# EAGLE board power_rev1 (EAGLE 9.6.1)
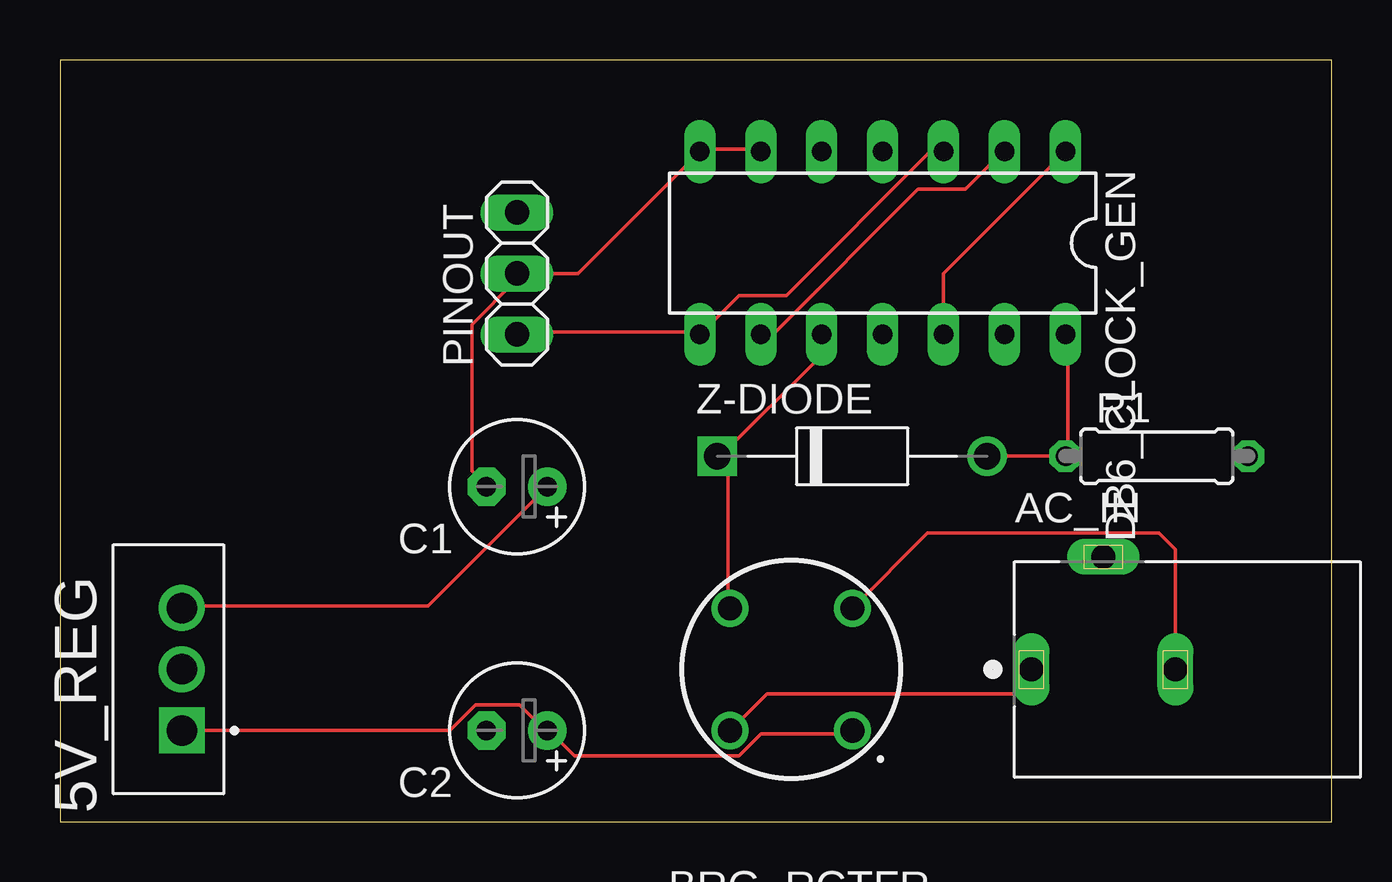
[diagram p0: board, top side]
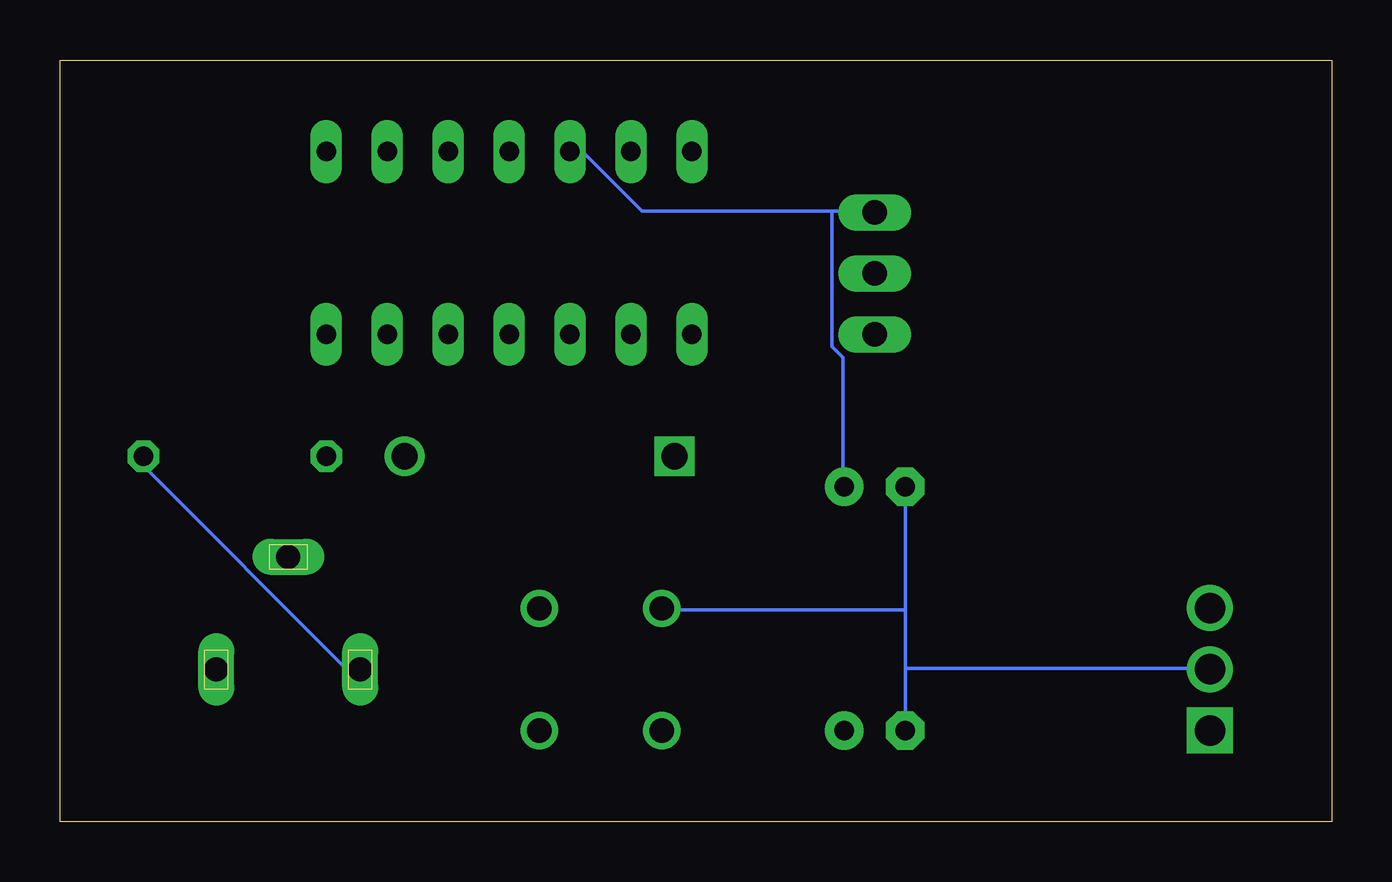
[diagram p1: board, bottom side, seen from below]

Size 53.01 x 31.76 mm. Coordinates in mm from the lower left corner, seen from the top.
Outline: 0,0 53.01,0 53.01,31.76 0,31.76 0,0
Copper layers (1*16): Top 0.035mm / dielectric 1.5mm / Bottom 0.035mm
Design rules "default": minimum track width 6mil, minimum drill 0.35mm, track to track 6mil, track to pad 6mil, pad to pad 6mil, via to via 6mil, smd to smd 6mil, copper to edge 40mil, drill to drill 6mil, minimum pad ring 10mil, minimum via ring 8mil, stop-mask expansion 4mil, vias tented up to drill 0mil, thermal gap 10mil

## Footprints (pad centres in the part's own frame; a part is rotated, then mirrored left to right if it is on the bottom)
TO255P1040X460X1968-3 = drill 1.27 pad 1.91 square: 1 0,0 | drill 1.27 pad 1.91: 2 2.55,0; 3 5.1,0
CUI_PJ-102A = drill 1 long: 1 -6.5,0; 2 -0.5,0; 3 -3.5,4.7
2W10 = drill 1.01 pad 1.55: 1 -2.55,2.55; 2 -2.55,-2.55; 3 2.55,-2.55; 4 2.55,2.55
E2,5-6 = drill 0.813 pad 1.6: + -1.27,0 | drill 0.813 pad 1.6 octagon: - 1.27,0
DIL14 = drill 0.813 long: 1 -7.62,-3.81; 2 -5.08,-3.81; 3 -2.54,-3.81; 4 0,-3.81; 5 2.54,-3.81; 6 5.08,-3.81; 7 7.62,-3.81; 8 7.62,3.81; 9 5.08,3.81; 10 2.54,3.81; 11 0,3.81; 12 -2.54,3.81; 13 -5.08,3.81; 14 -7.62,3.81
1X03 = drill 1.016 long: 1 -2.54,0; 2 0,0; 3 2.54,0
0207/7 = drill 0.813 octagon: 1 -3.81,0; 2 3.81,0
DIOAD1125W80L520D270 = drill 1.1: A 5.625,0 | drill 1.1 square: C -5.625,0

## Placement (x,y rotation side)
5V_REG  L7805CV  [TO255P1040X460X1968-3]  5.08,3.81 90 top
AC_IN  PJ-102A  [CUI_PJ-102A]  46.99,6.35 0 top
BRG_RCTFR  2W10  [2W10]  30.48,6.35 180 top
C1  100μF  [E2,5-6]  19.05,13.97 180 top
C2  100μF  [E2,5-6]  19.05,3.81 180 top
DB6_CLOCK_GEN  74LS90N  [DIL14]  34.29,24.13 180 top
PINOUT  [1X03]  19.05,22.86 90 top
R1  1000Ω  [0207/7]  45.72,15.24 0 top
Z-DIODE  1N4733A  [DIOAD1125W80L520D270]  33.02,15.24 0 top

## Library data of the parts
5V_REG = L7805CV; AVAILABILITY: Unavailable; DESCRIPTION: Linear Voltage Regulator IC 1 Output 1.5A TO-220; MF: STMicroelectronics; MP: L7805CV; PACKAGE: TO-220 STMicroelectronics; PRICE: None
AC_IN = PJ-102A; MANUFACTURER: CUI INC; PART_REV: 1.03; STANDARD: Manufacturer recommendations
BRG_RCTFR = 2W10; ARROW_PART_NUMBER: 2W10; ARROW_PRICE-STOCK: https://www.arrow.com/en/products/2w10/good-ark-semiconductor; DESCRIPTION: Silicon Bridge Rectifier, single phase, 2.0A; HEIGHT: mm; MANUFACTURER_NAME: Good-Ark; MANUFACTURER_PART_NUMBER: 2W10
C1 C2 = rcl; SPICEPREFIX: C
DB6_CLOCK_GEN = 74xx-us
PINOUT = pinhead
R1 = rcl; SPICEPREFIX: R
Z-DIODE = 1n4733a

## Nets
10_HZ_OUT: DB6_CLOCK_GEN.3 DB6_CLOCK_GEN.8 PINOUT.1
60_HZ: DB6_CLOCK_GEN.14 R1.1 Z-DIODE.A
GND: 5V_REG.2 BRG_RCTFR.3 C1.- C2.- DB6_CLOCK_GEN.6 DB6_CLOCK_GEN.7 DB6_CLOCK_GEN.10 PINOUT.2 Z-DIODE.C
N$2: AC_IN.2 BRG_RCTFR.2
N$3: AC_IN.1 BRG_RCTFR.4 R1.2
N$4: DB6_CLOCK_GEN.1 DB6_CLOCK_GEN.12
N$5: 5V_REG.1 BRG_RCTFR.1 C2.+
N$8: DB6_CLOCK_GEN.2 DB6_CLOCK_GEN.9
VCC: 5V_REG.3 C1.+ DB6_CLOCK_GEN.5 PINOUT.3

## Tracks (layer width: path | path; a pad name or v marks a point on that pad's centre or on a via)
10_HZ_OUT
  Top 0.152: PINOUT.1 19.15,20.42 26.62,20.42 DB6_CLOCK_GEN.8 28.3,21.95 30.28,21.95 36.22,27.89 36.83,27.89 DB6_CLOCK_GEN.3
60_HZ
  Top 0.152: Z-DIODE.A R1.1 42.01,15.24 42.01,20.27 DB6_CLOCK_GEN.14
GND
  Top 0.152: 27.53,15.24 31.65,19.36 31.65,20.27 DB6_CLOCK_GEN.10 | 27.53,15.24 27.84,14.94 27.84,8.99 BRG_RCTFR.3 | 27.53,15.24 Z-DIODE.C | DB6_CLOCK_GEN.6 29.21,28.04 26.77,28.04 DB6_CLOCK_GEN.7 21.59,22.86 PINOUT.2 19,22.86 19,22.55 17.17,20.73 17.17,14.63 17.78,14.02 C1.-
  Bottom 0.152: C1.- 17.78,8.84 | 17.78,8.84 17.78,6.4 | 17.78,6.4 C2.- | 17.78,6.4 5.13,6.4 5V_REG.2 | 17.78,8.84 27.84,8.84 BRG_RCTFR.3
N$2
  Top 0.152: BRG_RCTFR.2 36.16,12.03 45.8,12.03 46.49,11.34 AC_IN.2
N$3
  Top 0.152: AC_IN.1 40.49,5.6 40.23,5.34 29.47,5.34 BRG_RCTFR.4
  Bottom 0.152: R1.2 49.48,15.24 49.48,14.78 41.1,6.4 40.64,6.4 AC_IN.1
N$4
  Top 0.152: DB6_CLOCK_GEN.12 36.83,22.86 DB6_CLOCK_GEN.1
N$5
  Top 0.152: BRG_RCTFR.1 33.02,3.66 29.21,3.66 28.3,2.74 21.44,2.74 20.37,3.81 C2.+ 20.22,3.81 19.15,4.88 17.32,4.88 16.26,3.81 5V_REG.1
N$8
  Top 0.152: DB6_CLOCK_GEN.9 29.21,20.42 29.82,20.42 35.76,26.36 37.74,26.36 39.27,27.89 DB6_CLOCK_GEN.2
VCC
  Top 0.152: C1.+ 15.34,8.99 5.13,8.99 5V_REG.3
  Bottom 0.152: 20.83,25.45 19.15,25.45 PINOUT.3 | 20.83,25.45 28.75,25.45 31.19,27.89 31.65,27.89 DB6_CLOCK_GEN.5 | 20.83,25.45 20.83,19.81 20.37,19.36 20.37,14.02 C1.+